# Allegro board wsm_p3_20170904.brd
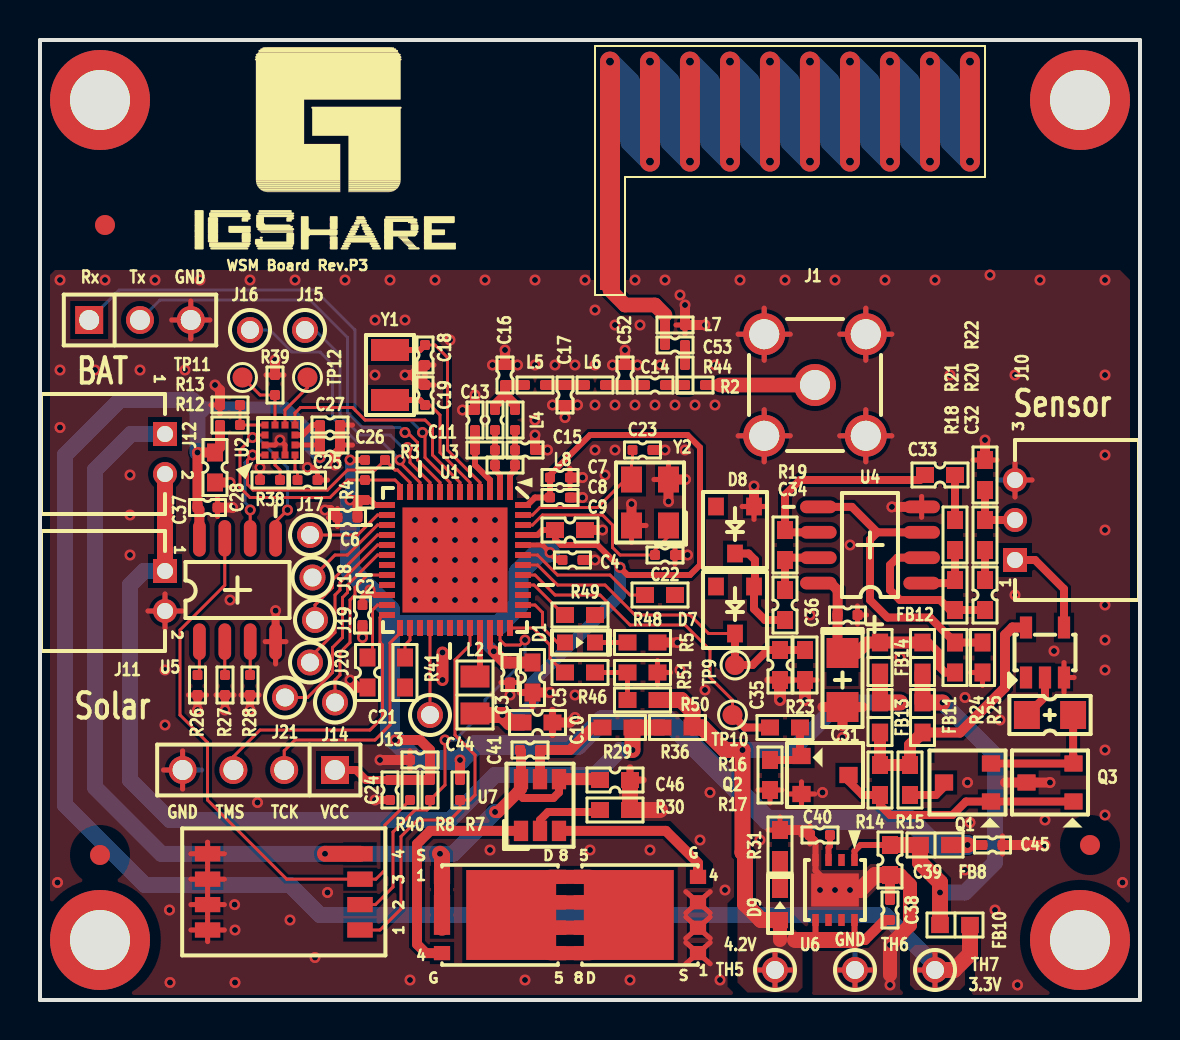
[diagram p0: board, top side]
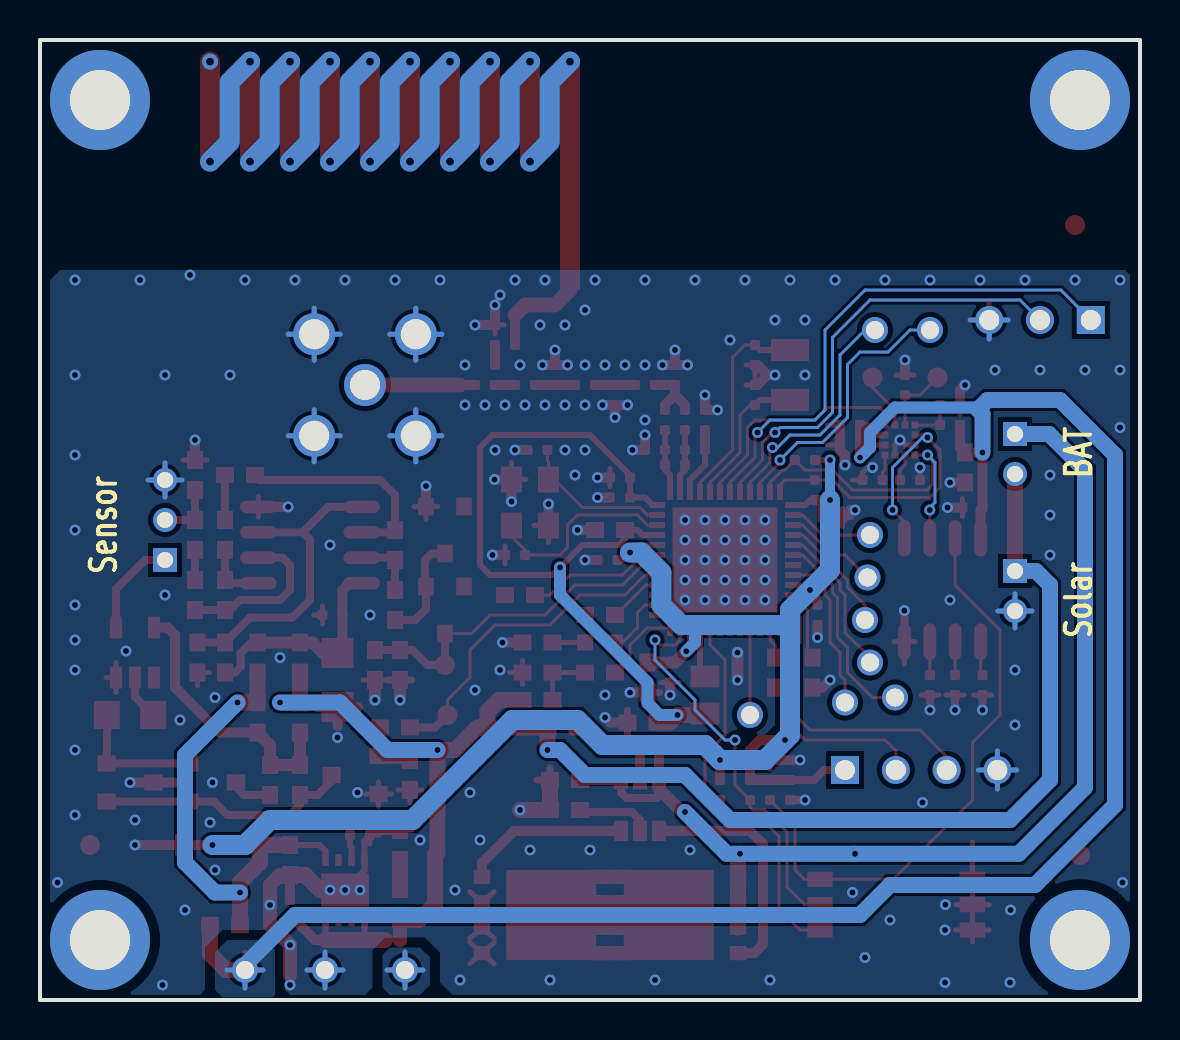
[diagram p1: board, bottom side, seen from below]

Outline 55 x 48 mm; copper layers: TOP, BOTTOM. Coordinates in mm from the lower left corner of the outline.
Outline path: 0,48 0,0 55,0 55,48 0,48

## Placement (name value [footprint] x y rotation side)
ANT1  ANTENNA  [ANTENNA868_915MHZ]  28.5 36 0 top
C2  100nF  [CC1005]  16.12 19.25 90 top
C3  100nF  [CC1005]  23.5 16.38 90 top
C4  100nF  [CC1005]  26.62 22 180 top
C5  22uF  [CC1608]  24.62 16.12 90 top
C6  100nF  [CC1005]  15.38 24.12 0 top
C7  100nF  [CC1005]  26 26.12 180 top
C8  100nF  [CC1005]  26 25.12 180 top
C9  22uF  [CC1608]  26.5 23.5 180 top
C10  DNI  [CC1608]  24.88 13.88 180 top
C11  100pF  [CC1005]  21.75 29 90 top
C13  3.6pF  [CC1005]  22.75 29 90 top
C14  100pF  [CC1005]  30.75 30.75 0 top
C15  3.6pF  [CC1005]  24.25 27.5 0 top
C16  2.7pF  [CC1005]  23.25 31.25 270 top
C17  6.2pF  [CC1005]  26.25 30.25 90 top
C18  12pF  [CC1005]  19.25 32.25 270 top
C19  12pF  [CC1005]  19.25 30.25 90 top
C21  1uF  [CC1608]  16.38 16.38 270 top
C22  DNI  [CC1005]  31.25 22.25 180 top
C23  DNI  [CC1005]  30.12 27.5 180 top
C24  100nF  [CC1005]  17.5 10.5 90 top
C25  100nF  [CC1005]  13.38 26 180 top
C26  100nF  [CC1005]  14.5 27.75 180 top
C27  100nF  [CC1005]  14.5 28.75 180 top
C28  10uF  [CC1608]  8.75 26.62 90 top
C29  47nF  [CC2012]  50.5 14.25 0 top
C31  6.8uF  [TC3216]  40.12 16 270 top
C32  200pF  [CC1608]  47.25 20.25 90 top
C33  680pF  [CC1608]  45 26.25 0 top
C34  1nF  [CC1608]  37.25 19.75 90 top
C35  560pF  [CC1608]  37 16.75 90 top
C36  100nF  [CC1005]  40.38 19.25 180 top
C37  100nF  [CC1005]  8.38 24.62 0 top
C38  100nF  [CC1005]  42.5 4.5 90 top
C39  2.2uF  [CC1608]  42.5 7 270 top
C40  100nF  [CC1005]  39 8.25 180 top
C41  100nF  [CC1005]  24.5 12.5 180 top
C44  100nF  [CC1005]  19 12 0 top
C45  100nF  [CC1005]  47.62 7.75 0 top
C46  1uF  [CC1608]  28.75 11 180 top
C52  3.3pF  [CC1005]  29.25 31.25 270 top
C53  1pF  [CC1005]  31.75 32.75 180 top
D1  BL-HG036A-AV-TRB  [BL-HG036A-AV]  27 17.88 0 top
D7  -  [BAT54]  34.75 19.5 180 top
D8  -  [BAT54]  34.75 23.5 180 top
D9  BL-HG036A-AV-TRB  [BL-HG036A-AV]  37 4.75 90 top
FB8  BLM18HE152SN1  [BEAD1608]  44.75 7.75 0 top
FB10  BLM18HE152SN1  [BEAD1608]  45.75 3.75 0 top
FB11  BLM18HE152SN1  [BEAD1608]  44.12 14.12 270 top
FB12  BLM18HE152SN1  [BEAD1608]  44.12 17.12 90 top
FB13  BLM18HE152SN1  [BEAD1608]  42 14.12 270 top
FB14  BLM18HE152SN1  [BEAD1608]  42 17.12 90 top
H1  PCB_HOLE  [PCB-HOLE]  3 45 0 top
H2  PCB_HOLE  [PCB-HOLE]  52 45 0 top
H3  PCB_HOLE  [PCB-HOLE]  3 3 0 top
H4  PCB_HOLE  [PCB-HOLE]  52 3 0 top
J1  RF__SMA-R-PC/DNI  [RF_SMA_R_PC]  38.75 30.75 0 top
J6  HEADER_2.54mm_3P  [HEADER3]  5 34 0 top
J7  HEADER_2.54mm_4P/DNI  [HEADER4]  14.75 11.5 180 top
J10  -  [A2001-WR03]  48.75 24 90 top
J11  -  [A2001-WR02]  6.25 20.45 270 top
J12  -  [A2001-WR02]  6.25 27.3 270 top
J13  1__PIN__HDR  [1PIN-HDR]  19.5 14.25 270 top
J14  1__PIN__HDR  [1PIN-HDR]  14.75 14.88 0 top
J15  1__PIN__HDR  [1PIN-HDR]  13.25 33.5 0 top
J16  1__PIN__HDR  [1PIN-HDR]  10.5 33.5 0 top
J17  1__PIN__HDR  [1PIN-HDR]  13.5 23.25 0 top
J18  1__PIN__HDR  [1PIN-HDR]  13.62 21.12 0 top
J19  1__PIN__HDR  [1PIN-HDR]  13.75 19 0 top
J20  1__PIN__HDR  [1PIN-HDR]  13.5 16.88 0 top
J21  1__PIN__HDR  [1PIN-HDR]  12.25 15.12 0 top
L2  6.8uH  [BEAD2012]  21.75 15.25 270 top
L3  7.5nH  [BEAD1005]  22.25 27.5 180 top
L4  7.5nH  [BEAD1005]  23.75 29 90 top
L5  6.8nH  [BEAD1005]  24.75 30.75 0 top
L6  6.8nH  [BEAD1005]  27.75 30.75 0 top
L7  12nH  [BEAD1005]  31.75 33.75 0 top
L8  18nH  [BEAD1005]  23.25 26.75 180 top
NOREF  -  [unnamed]  3.25 38.75 0 top
NOREF#2  -  [unnamed]  3 7.25 0 top
NOREF#3  -  [#2]  0 48 0 top
NOREF#4  -  [unnamed]  52.5 7.75 0 top
NOREF#5  -  [#2]  69.25 -8.62 0 top
NOREF#6  -  [#2]  0 0 90 top
NOREF#7  -  [#2]  13.38 43.88 0 top
NOREF#8  -  [#2]  68.25 11.12 0 top
Q1  MMBT3904  [SOT-23]  46.38 10.88 90 top
Q2  MMBT3904  [SOT-23]  39.25 11.25 270 top
Q3  MMBT3906  [SOT-23]  50.5 10.88 90 top
Q4  -  [CSD16413Q5A]  30 4.25 180 top
Q5  -  [CSD16413Q5A]  23 4.25 0 top
R2  0  [RC1005]  32.75 30.75 180 top
R3  4.7K  [RC1005]  16.75 27 180 top
R4  4.7K  [RC1005]  16.25 25.5 270 top
R5  330  [RC1608]  30.12 17.88 180 top
R7  4.7K  [RC1005]  21 10.5 90 top
R8  4.7K  [RC1005]  19.5 10.5 90 top
R12  1K  [RC1005]  9.5 28.75 180 top
R13  1K/DNI  [RC1005]  9.5 29.75 0 top
R14  47K  [RC1608]  42 11 90 top
R15  200  [RC1608]  43.5 11 90 top
R16  10K  [RC1608]  37.25 13.62 0 top
R17  10K  [RC1608]  36.5 11.25 90 top
R18  1M  [RC1608]  45.75 20.25 90 top
R19  1M  [RC1608]  37.25 22.75 270 top
R20  10K  [RC1608]  47.25 23.25 270 top
R21  10K  [RC1608]  45.75 23.25 90 top
R22  100K  [RC1608]  47.25 26.25 270 top
R23  510K  [RC1608]  38.25 16.75 90 top
R24  10K  [RC1608]  45.75 17.12 90 top
R25  10K  [RC1608]  47.12 17.12 90 top
R26  1K  [RC1005]  7.88 15.75 90 top
R27  1K  [RC1005]  9.25 15.75 90 top
R28  1K  [RC1005]  10.5 15.75 90 top
R29  330  [RC1608]  28.88 13.62 180 top
R30  1K  [RC1608]  28.75 9.5 0 top
R31  330  [RC1608]  37 7.75 270 top
R36  0  [RC1608]  31.88 13.62 180 top
R38  0  [RC1005]  11.5 26 180 top
R39  0  [RC1005]  11.75 30.75 270 top
R40  4.7K  [RC1005]  18.5 10.5 90 top
R41  0  [RC1608]  18.25 16.38 270 top
R44  0  [RC1005]  32.25 31.25 270 top
R46  200K  [RC1608]  27 16.38 180 top
R48  0  [RC1608]  31 20.25 0 top
R49  0  [RC1608]  27 19.25 0 top
R50  4.7K  [RC1608]  30.12 15 180 top
R51  4.7K  [RC1608]  30.12 16.38 0 top
S1  -  [KHS-42C]  16 3.5 90 top
TH5  D4V2P  [1PIN-HDR]  36.75 1.5 0 top
TH6  GND  [1PIN-HDR]  40.75 1.5 0 top
TH7  D3V3P  [1PIN-HDR]  44.75 1.5 0 top
TP9  T__POINT__S  [TP_SMD]  34.75 16.75 0 top
TP10  T__POINT__S  [TP_SMD]  34.62 14.25 0 top
TP11  T__POINT__S  [TP_SMD]  10.12 31.12 0 top
TP12  T__POINT__S  [TP_SMD]  13.38 31.12 270 top
U1  CC1310F128RGZT  [QFN48_7_0_5]  20.75 22 270 top
U2  LIS3MDL  [LGA-12]  12 28 90 top
U4  TLV342IDR  [SOP8_3_9_6_1_27]  41.5 22.75 90 top
U5  AT24HC02C-SSHM__  [SOP8_3_9_6_1_27]  9.88 20.5 0 top
U6  TPS73533QDRBRQ1  [QFN8_3_0_65]  39.75 5.5 180 top
U7  S-8200ABE-M6T1U  [SOT23-6P]  25 9.75 0 top
U8  SN74LVC1G04  [SOT23-5P_0_95P]  50.25 17.38 0 top
Y1  32.768KHz__XTAL/CM315D3279DZFT  [CM315]  17.5 31.25 90 top
Y2  24__MHz__Crystal/S3225A__Crystal  [S3225A]  30.5 24.88 90 top

## Library data of the parts
ANT1 = _ANTENNA868_915MHZ
C2-C4 C6-C8 C11 C13-C19 C22-C27 C36-C38 C40 C41 C44 C45 C52 C53 = _CC1005
C5 C9 C10 C21 C28 C32-C35 C39 C46 = _CC1608
C29 = _CC2012
C31 = _TC3216
D1 D9 = _BL-HG036A-AV
D7 D8 = _BAT54
FB8 FB10-FB14 = _BEAD1608
H1-H4 = _PCB-HOLE
J1 = _RF_SMA_R_PC
J6 = _HEADER3
J7 = _HEADER4
J10 = _A2001-WR03
J11 J12 = _A2001-WR02
J13-J21 TH5-TH7 = _1PIN-HDR
L2 = _BEAD2012
L3-L8 = _BEAD1005
Q1-Q3 = _SOT-23
Q4 Q5 = _CSD16413Q5A
R2-R4 R7 R8 R12 R13 R26-R28 R38-R40 R44 = _RC1005
R5 R14-R25 R29-R31 R36 R41 R46 R48-R51 = _RC1608
S1 = _KHS-42C
TP9-TP12 = _TP_SMD
U1 = _QFN48_7_0_5
U2 = _LGA-12
U4 U5 = _SOP8_3_9_6_1_27
U6 = _QFN8_3_0_65
U7 = _SOT23-6P
U8 = _SOT23-5P_0_95P
Y1 = _CM315
Y2 = _S3225A

## Footprints (pads in the part's own frame, mm; a bottom-side part is the same pattern mirrored in y, then rotated)
1PIN-HDR
  round 1.3 hole 0.9: 1(0,0)
A2001-WR02
  rect 1.2x1.2 hole 0.8: 1(-1,0)
  round 1.2 hole 0.8: 2(1,0)
A2001-WR03
  rect 1.2x1.2 hole 0.8: 1(-2,0)
  round 1.2 hole 0.8: 2(0,0) 3(2,0)
ANTENNA868_915MHZ
  rect 1x1 smd: 1(0,0)
BAT54
  rect 0.787x0.889 smd: 1(0,1.175) 2(-0.95,-1.175) 3(0.95,-1.175)
BEAD1005
  custom 0.5x0.5 smd: 1(-0.5,0) 2(0.5,0)
BEAD1608
  rect 0.889x0.813 smd: 1(-0.75,0) 2(0.75,0)
BEAD2012
  rect 1.1x1.45 smd: 1(-0.925,0) 2(0.925,0)
BL-HG036A-AV
  rect 0.8x0.8 smd: 1(-0.75,0) 2(0.75,0)
CC1005
  custom 0.5x0.5 smd: 1(-0.5,0) 2(0.5,0)
CC1608
  rect 0.9x0.8 smd: 1(-0.75,0) 2(0.75,0)
CC2012
  rect 1.295x1.397 smd: 1(-1.156,0) 2(1.156,0)
CM315
  rect 1.1x1.9 smd: 1(-1.25,0) 2(1.25,0)
CSD16413Q5A
  rect 0.813x0.711 smd: 1(-2.9,1.905) 2(-2.9,0.635) 3(-2.9,-0.635) 4(-2.9,-1.905) 5(2.9,-1.905) 6(2.9,-0.635) 7(2.9,0.635) 8(2.9,1.905)
  rect 4.496x4.496 smd: 9(0.559,0)
HEADER3
  rect 1.4x1.4 hole 1: 1(-2.54,0)
  round 1.4 hole 1: 2(0,0) 3(2.54,0)
HEADER4
  rect 1.4x1.4 hole 1: 1(0,0)
  round 1.4 hole 1: 2(2.54,0) 3(5.08,0) 4(7.62,0)
KHS-42C
  rect 0.762x1.27 smd: 1(0,0) 2(1.27,0) 3(2.54,0) 4(3.81,0) 5(3.81,7.62) 6(2.54,7.62) 7(1.27,7.62) 8(0,7.62)
LGA-12
  rect 0.35x0.35 smd: 1(-0.75,0.75) 2(-0.75,0.25) 3(-0.75,-0.25) 4(-0.75,-0.75) 5(-0.25,-0.75) 6(0.25,-0.75) 7(0.75,-0.75) 8(0.75,-0.25) 9(0.75,0.25) 10(0.75,0.75) 11(0.25,0.75) 12(-0.25,0.75)
PCB-HOLE
  round 5 hole 3: 1(0,0)
QFN8_3_0_65
  rect 0.325x0.6 smd: 1(-0.975,-1.5) 2(-0.325,-1.5) 3(0.325,-1.5) 4(0.975,-1.5) 5(0.975,1.5) 6(0.325,1.5) 7(-0.325,1.5) 8(-0.975,1.5)
  rect 2.388x1.651 smd: 9(0,0)
QFN48_7_0_5
  rect 0.8x0.3 smd: 1(-3.4,2.75) 2(-3.4,2.25) 3(-3.4,1.75) 4(-3.4,1.25) 5(-3.4,0.75) 6(-3.4,0.25) 7(-3.4,-0.25) 8(-3.4,-0.75) 9(-3.4,-1.25) 10(-3.4,-1.75) 11(-3.4,-2.25) 12(-3.4,-2.75) 25(3.4,-2.75) 26(3.4,-2.25) 27(3.4,-1.75) 28(3.4,-1.25) 29(3.4,-0.75) 30(3.4,-0.25) 31(3.4,0.25) 32(3.4,0.75) 33(3.4,1.25) 34(3.4,1.75) 35(3.4,2.25) 36(3.4,2.75)
  rect 0.3x0.8 smd: 13(-2.75,-3.4) 14(-2.25,-3.4) 15(-1.75,-3.4) 16(-1.25,-3.4) 17(-0.75,-3.4) 18(-0.25,-3.4) 19(0.25,-3.4) 20(0.75,-3.4) 21(1.25,-3.4) 22(1.75,-3.4) 23(2.25,-3.4) 24(2.75,-3.4) 37(2.75,3.4) 38(2.25,3.4) 39(1.75,3.4) 40(1.25,3.4) 41(0.75,3.4) 42(0.25,3.4) 43(-0.25,3.4) 44(-0.75,3.4) 45(-1.25,3.4) 46(-1.75,3.4) 47(-2.25,3.4) 48(-2.75,3.4)
  rect 5.25x5.25 smd: 49(0,0)
RC1005
  custom 0.5x0.5 smd: 1(-0.5,0) 2(0.5,0)
RC1608
  rect 0.9x0.8 smd: 1(-0.75,0) 2(0.75,0)
RF_SMA_R_PC
  round 2.1 hole 1.5: 1(0,0) 2(-2.54,2.54) 3(2.54,2.54) 4(2.54,-2.54) 5(-2.54,-2.54)
S3225A
  rect 1.3x1.05 smd: 1(-1.15,-0.925) 2(1.15,-0.925) 3(1.15,0.925) 4(-1.15,0.925)
SOP8_3_9_6_1_27
  oval 0.635x1.829 smd: 1(-1.905,-2.583) 2(-0.635,-2.583) 3(0.635,-2.583) 4(1.905,-2.583) 5(1.905,2.583) 6(0.635,2.583) 7(-0.635,2.583) 8(-1.905,2.583)
SOT23-5P_0_95P
  rect 0.61x1.092 smd: 1(-0.95,-1.25) 2(0,-1.25) 3(0.95,-1.25) 4(0.95,1.25) 5(-0.95,1.25)
SOT23-6P
  rect 0.711x1.016 smd: 1(-0.95,-1.295) 2(0,-1.295) 3(0.95,-1.295) 4(0.95,1.295) 5(0,1.295) 6(-0.95,1.295)
SOT-23
  rect 0.813x0.914 smd: 1(-0.95,-1.175) 2(0.95,-1.175) 3(0,1.175)
TC3216
  rect 1.499x1.6 smd: 1(-1.35,0) 2(1.35,0)
TP_SMD
  round 1 smd: 1(0,0)
unnamed
  round 1 smd: (0,0)

## Nets
D3V3P: C26.2 C27.2 C28.2 C37.1 FB10.2 R12.2 TH7.1 U2.5 U2.6 U5.8
D3V3P_MCU: C2.2 C3.2 C4.2 C5.2 C6.2 C24.2 C44.2 C45.1 FB8.2 J7.1 R3.2 R4.2 R7.2 R8.2 R40.2 U1.13 U1.22 U1.34 U1.44
D3V3P_RX: C31.1 C36.2 FB12.2 FB14.2 R24.1 U4.8
D3V3P_TX: FB11.2 FB13.2 R14.2 R15.2 U8.5
D3V3P_US: C39.1 FB8.1 FB10.1 FB11.1 FB12.1 U6.1
D4V2P: C38.1 D9.1 FB13.1 FB14.1 R36.1 R50.1 TH5.1 U6.5 U6.8
GND: C2.1 C3.1 C4.1 C5.1 C6.1 C7.1 C8.1 C9.1 C10.1 C11.2 C15.2 C16.1 C17.1 C18.2 C19.2 C21.2 C22.1 C23.1 C24.1 C25.1 C26.1 C27.1 C28.1 C31.2 C35.1 C36.1 C37.2 C38.2 C39.2 C40.2 C44.1 C45.2 C46.1 C52.1 D8.2 J1.2 J1.3 J1.4 J1.5 J6.3 J7.4 J10.3 J11.2 L7.2 Q2.2 Q3.3 Q4.1 Q4.2 Q4.3 R5.1 R13.1 R17.1 R22.1 R23.1 R25.1 R26.1 R27.1 R28.1 R30.2 R31.1 R38.2 R39.1 R51.2 S1.5 S1.6 S1.7 S1.8 TH6.1 U1.49 U2.3 U2.12 U4.4 U5.4 U6.4 U6.9 U8.3 Y2.2 Y2.4
GND-B: C41.2 C46.2 J12.1 Q5.1 Q5.2 Q5.3 S1.4 U7.4 U7.6
VDDR: C7.2 C8.2 C9.2 C10.2 L2.2 U1.45 U1.48
/RESET: R8.1 S1.2 U1.35
BTN_DOWN: J21.1 U1.18
BTN_RIGHT: J13.1 U1.28
BTN_SELECT: J20.1 U1.17
DCDC_SW: L2.1 U1.33
DRDY: TP12.1 U2.8
EEPROM_WP: R40.1 S1.3 U5.7
ENABLE: R12.1 R13.2 U2.10
I2C_SCL: R3.1 U1.11 U2.1 U5.6
I2C_SDA: R4.1 U1.12 U2.11 U5.5
INT: U1.6 U2.7
JTAG_TCK: J7.2 U1.25
JTAG_TMS: J7.3 U1.24
LCD_CS: J14.1 U1.20
LCD_MODE: J15.1 U1.9
LCD_RESET: J16.1 U1.10
PLS_OUT: J10.1 U8.4
ROM_EN: R7.1 S1.1 U1.32
RX_ADC: C35.2 D7.1 R23.2 TP9.1 U1.42
RX_IN: J10.2 R20.1 R22.2
RX_TX: C11.1 L3.2 U1.3
SA1: R39.2 TP11.1 U2.9
SPI_MISO: J17.1 U1.14
SPI_MOSI: J18.1 U1.15
SPI_SCK: J19.1 U1.16
STATUS_LED1: D1.1 U1.38
TX_TRIG: R16.1 TP10.1 U1.41
UART_RX: J6.1 U1.7
UART_TX: J6.2 U1.8
N16701813: C25.2 U2.4
N16705809: C32.2 R20.2
N16705820: C32.1 R18.1 U4.2
N16705966: R24.2 R25.2 U4.3 U4.5
N16706795: C33.1 R19.1 U4.6
N16707221: R18.2 R21.1 U4.1
N16707237: C33.2 R21.2
N16707258: C34.2 R19.2 U4.7
N16707911: C34.1 D7.2 D8.1
N16724996: Q2.1 R16.2 R17.2
N16725044: Q1.1 Q2.3 Q3.1 R14.1
N16725134: C29.2 Q1.2 Q3.2
N16725188: C29.1 U8.2
N16760492: R27.2 U5.2
N16760496: R28.2 U5.3
N16760500: R26.2 U5.1
N16783258: C40.1 U6.3
N16792762: D9.2 R31.2
N16804439: J11.1 J12.2 R29.1 R36.2
N16804638: C41.1 R29.2 U7.5
N16804661: Q5.4 U7.1
N16804663: Q4.4 U7.3
N16805702: R30.1 U7.2
N16807892: Q4.5 Q4.6 Q4.7 Q4.8 Q4.9 Q5.5 Q5.6 Q5.7 Q5.8 Q5.9
N16891758: J1.1 R2.1
N16891821: C14.2 R2.2 R44.2
N16891831: C13.2 C16.2 L4.2 L5.1
N16891837: C13.1 L3.1 L8.2 U1.2
N16891839: C23.2 U1.47 Y2.3
N16891854: C14.1 C52.2 L6.2
N16891876: C17.2 L5.2 L6.1
N16891929: C15.1 L4.1 L8.1 U1.1
N16891931: C22.2 U1.46 Y2.1
N16892413: D1.2 R5.2
N16892809: R41.1 U1.26
N16898279: C53.1 R44.1
N16899923: R46.2 U1.36
N16902060: R48.1 U1.43
N16908824: C18.1 U1.4 Y1.2
N16908828: C19.1 U1.5 Y1.1
N16908887: C21.1 U1.23
N16909290: ANT1.1 C53.2 L7.1
N16917845: R49.1 U1.40
N16921284: R46.1 R50.2 R51.1
N167017791: R38.1 U2.2
N167250560: Q1.3 R15.1

Pads without a net: D7 3; D8 3; H1 1; H2 1; H3 1; H4 1; R41 2; R48 2; R49 2; U1 19 21 27 29 30 31 37 39; U6 2 6 7; U8 1

## Via types
v1: diameter 0.55, hole 0.3, TOP to BOTTOM, 226 vias
v2: diameter 0.8, hole 0.4, TOP to BOTTOM, 19 vias

## Routing (per net, layer and track width the routed paths; a pad name or vN(x,y) marks a point on that pad's centre or on a via; arc(x,y) is an arc through that point)
D3V3P: length 102.4
  TOP w0.25: 13,28.25 U2.6 ; U2.5 C26.2
  TOP w0.254: 44.75,0.6 TH7.1 ; TH7.1 43.85,1.5 ; TH7.1 44.75,2.4
  TOP w0.3: 13,28.25 13.12,28.25 13.62,28.75 C27.2
  TOP w0.5: v1(14,27.12) C26.2 C27.2 ; U5.8 7.97,24.53 C37.1 v1(7.88,27.38) C28.2 9,27.62 R12.2
  TOP w0.8: TH7.1 45.7,1.5 46.5,2.3 FB10.2
  BOTTOM w0.254: 43.85,1.5 TH7.1 ; TH7.1 44.75,0.6 ; TH7.1 45.65,1.5
  BOTTOM w0.6: v1(14,27.12) 13.5,27.62 13.5,28.38 12.25,29.62 8.2,29.62 8.1,29.52
  BOTTOM w0.8: TH7.1 44.75,1.75 42.25,4.25 14,4.25 12.5,5.75 5.25,5.75 1.25,9.75 1.25,27.25 4,30 7.62,30 8.1,29.52 7.88,29.3 v1(7.88,27.38)
D3V3P_MCU: length 81.6
  TOP w0.25: v1(25.5,22.38) 25.12,22.75 U1.44
  TOP w0.3: R3.2 v1(15.5,27) ; C4.2 25.88,22 v1(25.5,22.38) ; U1.13 16.75,24.75 16.5,25 R4.2 ; U1.34 22.5,17.62 v1(22.69,17.44) ; U1.22 16.75,20.25 v1(16.5,20.5) 16.12,20.12 C2.2
  TOP w0.4: C24.2 16.3,11 15.8,11.5 J7.1
  TOP w0.5: R7.2 v1(21,12) ; 16,25 v1(15.5,25) ; 16,25 R4.2 ; 16,25 15.88,24.88 C6.2 ; C24.2 R40.2 R8.2 C44.2 19.5,12.5 19,13 v1(17.75,13) ; C45.1 v1(46.38,7.75)
  TOP w0.6: C5.2 C3.2 23.25,16.88 v1(22.69,17.44)
  TOP w0.8: v1(46.38,7.75) FB8.2
  BOTTOM w0.5: v1(15.5,27) v1(15.5,25)
  BOTTOM w0.6: v1(22.69,17.44) 22.25,17.88 22.25,18.75
  BOTTOM w1: 17.5,18.75 22.93,18.75 23.93,19.75 23.93,21.38 24.93,22.38 v1(25.5,22.38) ; 17.5,18.75 17.5,19.5 v1(16.5,20.5) 15.5,21.5 v1(15.5,25) ; 17.5,18.75 17.5,13.25 v1(17.75,13) 18.75,12 v1(21,12) 21.75,12.75 26.88,12.75 28.12,14 31.38,14 36.38,9 43.5,9 44.75,7.75 v1(46.38,7.75)
D3V3P_RX: length 11.2
  TOP w0.4: FB12.2 44.43,17.88 44.97,17.34 44.97,16.66 45.25,16.38 R24.1
  TOP w0.5: C31.1 39.88,17.6 C36.2 39.88,19.26 39.88,20.49 39.53,20.84 U4.8
  TOP w0.6: C31.1 40.85,17.35 41.38,17.88 FB14.2 FB12.2
D3V3P_TX: length 13.9
  TOP w0.5: FB11.2 46,13.38 48.25,15.62 48.25,18.25 48.62,18.62 U8.5
  TOP w0.6: FB13.2 R14.2 R15.2 43.5,12.75 FB11.2
D3V3P_US: length 23.2
  TOP w0.3: U6.1 40.73,7.45 41.02,7.75 C39.1
  TOP w0.8: FB10.1 v1(45,5.38) 45,5.87 44,6.87 FB8.1 C39.1 ; FB12.1 FB11.1 v1(45.12,14.88)
  BOTTOM w0.8: v1(45,5.38) 46.25,5.38 47.75,6.88 47.75,12.25 v1(45.12,14.88)
D4V2P: length 42.3
  TOP w0.254: 35.85,1.5 TH5.1 ; TH5.1 36.75,2.4 ; TH5.1 37.65,1.5 ; TH5.1 36.75,0.6
  TOP w0.3: 38.75,3 38.77,3.02 U6.5 ; U6.8 40.73,3.02 40.75,3
  TOP w0.5: 40.75,3 41.25,3 42.25,4 C38.1
  TOP w0.7: 37,3 37,3.75
  TOP w0.8: R50.1 32.06,15 32.62,14.43 R36.1 33.12,13.62 34.25,12.5 v1(35.12,12.5) 35.12,7.38 35.25,7.25 35.25,4.8 36.05,4 D9.1 37,3.75 ; v1(43,14.88) FB13.1 FB14.1 ; 37.75,3 40.75,3
  BOTTOM w0.254: TH5.1 36.75,2.4 ; TH5.1 36.75,0.6 ; TH5.1 37.65,1.5 ; TH5.1 35.85,1.5
  BOTTOM w0.8: v1(35.12,12.5) 37.62,12.5 40,14.88 v1(43,14.88)
GND: length 213.2
  TOP w0.25: C27.1 15.62,28.75 ; U2.12 11.75,27.75 v1(12,28) 12.25,27.75 U2.3 ; 14.38,26 C25.1 13.88,26.38 13.62,26.62 v1(13.38,26.62) ; R38.2 v1(11,26.62) ; C26.1 15.62,27.75
  TOP w0.254: J6.3 8.49,34 ; J6.3 7.54,33.05 ; J6.3 7.54,34.95 ; J6.3 6.59,34 ; 47.12,15.72 R25.1 46.52,16.38 ; Q4.3 33.51,4.35 ; Q4.3 32.29,5.42 ; Q4.3 32.29,4.35 ; Q4.3 33.51,5.42 ; 40.75,0.6 TH6.1 ; TH6.1 39.85,1.5 ; TH6.1 41.65,1.5 ; 30.88,15.77 R51.2 ; R51.2 30.88,16.98 ; R51.2 31.53,16.38 ; J7.4 7.13,12.45 ; J7.4 7.13,10.55 ; J7.4 6.18,11.5 ; 32.29,3.08 Q4.2 ; Q4.2 32.29,4.15 ; Q4.2 33.51,4.15 ; Q4.2 33.51,3.08 ; 23.05,15.88 C3.1 23.95,15.88 ; S1.6 8.38,6.62 ; S1.6 7.54,6.04 ; S1.6 9.22,6.04 ; S1.6 8.38,5.46 ; 9,29.3 R13.1 8.55,29.75 ; S1.7 9.22,4.77 ; S1.7 7.54,4.77 ; S1.7 8.38,4.19 ; S1.7 8.38,5.35 ; R17.1 37.1,10.5 ; R17.1 36.5,9.85 ; R17.1 35.9,10.5 ; 8.8,15.25 R27.1 9.7,15.25 ; C36.1 41.33,19.25 ; C36.1 40.88,18.8 ; C36.1 40.88,19.7 ; 48.75,25.15 J10.3 ; J10.3 48.75,26.85 ; J10.3 49.6,26 ; J1.5 36.21,29.51 ; J1.5 34.91,28.21 ; J1.5 36.21,26.91 ; J1.5 37.51,28.21 ; Q2.2 38.08,10.91 ; Q2.2 38.08,9.69 ; Q2.2 38.73,10.3 ; Q2.2 37.42,10.3 ; J1.3 42.59,33.29 ; J1.3 41.29,34.59 ; J1.3 39.99,33.29 ; J1.3 41.29,31.99 ; 19.25,31.3 C18.2 19.7,31.75 ; 38.85,16 R23.1 37.65,16 ; 38.05,8.25 C40.2 ; C40.2 38.5,8.7 ; C40.2 38.5,7.8 ; 11.3,31.25 R39.1 12.2,31.25 ; 8.33,15.25 R26.1 7.42,15.25 ; 31.43,26.88 Y2.2 30.7,26.02 ; S1.8 8.38,4.08 ; S1.8 8.38,2.92 ; S1.8 9.22,3.5 ; S1.8 7.54,3.5 ; 29.57,22.87 Y2.4 30.3,23.73 ; C6.1 14.88,24.58 ; C6.1 14.42,24.12 ; C6.1 14.88,23.67 ; 32.29,2.88 Q4.1 ; Q4.1 33.51,1.81 ; Q4.1 32.29,1.81 ; Q4.1 33.51,2.88 ; 11.78,16.8 U5.4 ; U5.4 12.3,17.92 ; U5.4 11.26,17.92 ; 35.11,24.68 D8.2 ; D8.2 35.7,24.03 ; D8.2 36.29,24.68 ; S1.5 8.38,7.89 ; S1.5 9.22,7.31 ; S1.5 8.38,6.73 ; S1.5 7.54,7.31 ; 41.29,26.91 J1.4 ; J1.4 42.59,28.21 ; J1.4 39.99,28.21 ; J1.4 41.29,29.51 ; J1.2 36.21,34.59 ; J1.2 37.51,33.29 ; J1.2 36.21,31.99 ; J1.2 34.91,33.29 ; 36.4,8.5 R31.1 37,9.15 ; 46.65,27 R22.1 47.85,27 ; 31.75,22.7 C22.1 31.75,21.8 ; 44.08,24.14 U4.4 44.08,25.17 ; 32.25,33.3 L7.2 31.8,33.75 ; 26.5,26.58 C7.1 26.5,25.67 ; 5.4,19.45 J11.2 ; J11.2 6.25,18.6 ; J11.2 6.25,20.3 ; J11.2 7.1,19.45 ; 18.5,11.55 C44.1 18.5,12.45 ; U8.3 51.2,16.87 ; U8.3 51.2,15.38 ; U8.3 51.71,16.12 ; 19.25,31.2 C19.2 19.7,30.75 ; 8.88,25.08 C37.2 8.88,24.17 ; 48.12,8.2 C45.2 48.12,7.3 ; 10.05,15.25 R28.1 10.95,15.25
  TOP w0.3: v1(39.75,5.5) 38.77,6.47 U6.4 38.77,7.97 C40.2
  TOP w0.356: 30.15,11 C46.1 29.5,11.6 ; 37.6,16 C35.1 36.4,16 ; C10.1 25.62,14.48 ; C10.1 25.88,13.88 ; C10.1 25.62,13.27 ; 24.62,14.72 C5.1 24.02,15.38
  TOP w0.4: R28.1 v1(10.5,14.5) ; R26.1 v1(7.88,14.5) ; R27.1 v1(9.25,14.5) ; U5.4 v1(11.78,19.47) ; C24.1 v1(16.75,10)
  TOP w0.5: v1(32.27,26.02) Y2.2 v1(31.43,24.93) ; C23.1 v1(31.25,27.5) ; C44.1 v1(17,12) ; C21.2 15.88,15.62 v1(15.5,16) ; Y2.4 v1(29.57,24.8) ; C2.1 v1(16.12,18.12) ; C52.1 v1(29.25,32.5) ; C52.1 v1(29.88,31.75) ; C52.1 v1(28.62,31.75) ; R22.1 v1(47.25,28) ; C37.2 v1(9.62,24.62) ; C45.2 v1(50.25,7.75) ; v1(21.75,30.25) C11.2 v1(21.12,29.5) ; 25.88,13.88 26.5,13.88 v1(26.75,14.12) ; 47.12,16.43 R25.1 ; C3.1 v1(23.5,15.25) ; 18.62,31.25 19.12,31.75 C18.2 ; 18.62,31.25 v1(18.25,31.25) ; 18.62,31.25 19.12,30.75 C19.2 ; v1(33.25,33.75) L7.2 v1(32.25,34.75) ; C38.2 C39.2 ; C4.1 v1(27.75,22) ; C40.2 38.25,8.5 R31.1 ; R39.1 v1(11.75,32) ; v1(14.25,24.5) 14.5,24.5 C6.1 ; C8.1 v1(27.12,25.12) ; C22.1 v1(32.38,22.25) ; v1(50.5,10.88) Q3.3 48.25,10.88 ; v1(14.75,26.75) 14.75,27.25 15,27.5 C26.1 C27.1 ; C17.1 v1(26.25,29.12) ; C17.1 v1(26.88,29.75) ; C17.1 v1(25.62,29.75) ; D8.2 v1(35.7,25.7) ; C28.1 v1(9.5,25.88) ; C16.1 v1(23.88,31.75) ; C16.1 v1(22.62,31.75) ; C16.1 v1(23.25,32.5) ; C9.1 v1(28.12,23.5) ; v1(24.75,28.25) C15.2 v1(25.38,27.5) ; U4.4 v1(42.59,24.66) ; C5.1 v1(25.5,15.38) ; C7.1 v1(27.12,26.12) ; R5.1 v1(31.88,17.88) ; R13.1 9,30.5 v1(8.75,30.75)
  TOP w0.508: 40.12,13.7 C31.2 ; C31.2 41.13,14.65 ; C31.2 39.12,14.65
  TOP w0.6: R23.1 v1(38.25,15) ; v1(20.12,17.38) v1(20.12,16) ; C35.1 v1(37,15) ; C31.2 40.12,14.85
  TOP w0.7: C39.2 43,6.25 43.5,5.75 v1(43.5,4.75) 43.5,3.75 v1(42.5,2.75) 42.5,1.25
  TOP w0.8: C46.1 R30.2 v1(31,9.5) ; C39.2 41.75,6.25 41,5.5 v1(40.5,5.5) v1(39.75,5.5)
  BOTTOM w0.254: 7.54,33.05 J6.3 ; J6.3 8.49,34 ; J6.3 6.59,34 ; TH6.1 40.75,2.4 ; TH6.1 39.85,1.5 ; TH6.1 40.75,0.6 ; TH6.1 41.65,1.5 ; 7.13,10.55 J7.4 ; J7.4 7.13,12.45 ; J7.4 8.08,11.5 ; J7.4 6.18,11.5 ; 36.21,31.99 J1.2 ; J1.2 34.91,33.29 ; J1.2 36.21,34.59 ; J1.2 37.51,33.29 ; 39.99,28.21 J1.4 ; J1.4 42.59,28.21 ; J1.4 41.29,29.51 ; J1.4 41.29,26.91 ; J1.5 37.51,28.21 ; J1.5 36.21,26.91 ; J1.5 36.21,29.51 ; J1.5 34.91,28.21 ; J10.3 49.6,26 ; J10.3 48.75,26.85 ; J10.3 48.75,25.15 ; J10.3 47.9,26 ; 6.25,18.6 J11.2 ; J11.2 7.1,19.45 ; J11.2 6.25,20.3 ; J11.2 5.4,19.45 ; J1.3 41.29,34.59 ; J1.3 41.29,31.99 ; J1.3 39.99,33.29 ; J1.3 42.59,33.29
  vias: v1(0.88,5.88) v1(1,36) v1(1,31.5) v1(1,28.62) v1(2.75,31.5) v1(3.25,36) v1(4.5,26.25) v1(4.5,24.25) v1(4.5,22.25) v1(5,31.5) v1(5.75,36) v1(6.25,16.5) v1(6.25,13.75) v1(6.47,4.5) v1(6.5,0.88) v1(7.25,31.5) v1(8,36) v1(9.5,20) v1(9.73,4.77) v1(9.75,3.5) v1(9.75,0.88) v1(10.5,36) v1(10.88,9.88) v1(12.5,4) v1(12.75,36) v1(13.75,2.12) v1(14.38,5.38) v1(15.25,36) v1(16.75,34) v1(16.75,31.25) v1(17.5,36) v1(18.25,34) v1(18.5,1) v1(18.75,24) v1(18.75,23) v1(18.75,22) v1(18.75,21) v1(18.75,20) v1(19.75,36) v1(19.75,24) v1(19.75,23) v1(19.75,22) v1(19.75,21) v1(19.75,20) v1(20.5,33) v1(20.75,24) v1(20.75,23) v1(20.75,22) v1(20.75,21) v1(20.75,20) v1(21.75,24) v1(21.75,23) v1(21.75,22) v1(21.75,21) v1(21.75,20) v1(22.25,36) v1(22.5,7.5) v1(22.75,24) v1(22.75,23) v1(22.75,22) v1(22.75,21) v1(22.75,20) v1(24.25,1) v1(24.75,36) v1(24.75,31.75) v1(24.75,29) v1(25.75,31.75) v1(26.75,31.75) v1(26.75,15.25) v1(27.25,36) v1(27.5,7.5) v1(27.75,34.5) v1(27.75,31.75) v1(27.75,29.75) v1(27.75,27.5) v1(28.25,26.25) v1(28.75,33.75) v1(28.75,29.75) v1(28.75,27.5) v1(29.5,1) v1(29.75,36) v1(29.75,29.75) v1(30,33.75) v1(30.5,7.5) v1(30.75,29.75) v1(31,31.75) v1(31.25,36) v1(31.75,29.75) v1(32,35.25) v1(32,16.5) v1(32.25,27.5) v1(32.75,29.75) v1(33,8) v1(33.25,15.5) v1(33.5,10.38) v1(33.75,31.75) v1(33.75,29.75) v1(34,1) v1(34.25,5.5) v1(35,36) v1(36,8) v1(37.25,36) v1(38.5,19.25) v1(39,5.5) v1(39.12,10.38) v1(39.75,36) v1(40.12,13.12) v1(40.5,22.75) v1(42.25,36) v1(42.5,0.75) v1(43,17.12) v1(44.75,36) v1(45.5,31.25) v1(46.25,15.12) v1(46.25,6.5) v1(46.38,10.88) v1(46.5,8.88) v1(47.5,36.25) v1(47.75,4.5) v1(48,14) v1(48.75,31.25) v1(48.75,20.25) v1(48.88,0.75) v1(50,36) v1(50.25,9) v1(50.7,17.45) v1(53.25,36) v1(53.25,31.25) v1(53.25,27.25) v1(53.25,23.5) v1(53.25,19.75) v1(53.25,18) v1(53.25,16.5) v1(53.25,12.5) v1(53.25,9.25) v1(54.12,5.88)
GND-B: length 56.6
  TOP w0.4: U7.4 25.95,10.38 25.67,10.1 24.15,10.1 23.88,10.38
  TOP w0.5: C41.2 24.05,12.45 U7.6
  TOP w0.6: U7.4 27.95,11.04 C46.2 ; v1(22.75,9.4) 22.9,9.4 24.05,10.55 U7.6
  TOP w0.8: v1(14.25,7.31) S1.4 ; Q5.3 Q5.2 Q5.1 20.1,7.21 v1(20,7.31)
  BOTTOM w0.8: J12.1 4.55,28.3 2.75,26.5 2.75,10.62 6.07,7.31 v1(14.25,7.31) v1(20,7.31) 20.66,7.31 v1(22.75,9.4)
VDDR: length 40.3
  TOP w0.3: U1.48 24.38,24.75 24.75,25.12 C8.2 C7.2 25.5,26.25 27.5,28.25 32.38,28.25 33,27.62 33,21.75 32.5,21.25 29.38,21.25 v1(29,21.62) 27.88,22.75 26.05,22.75 25.75,23.05 C9.2 25.12,23.5 24.88,23.25 U1.45
  TOP w0.8: C10.2 23.5,13.88 v1(23.12,14.25) 21.82,14.25 L2.2
  BOTTOM w0.6: v1(23.12,14.25) 24.02,14.25 24.62,14.85 24.62,15.88 29,20.25 v1(29,21.62)
/RESET: length 19.8
  TOP w0.15: U1.35 23,18 23.25,17.75 24,17.75 v1(24.25,18) ; v1(20.25,13) 20.25,10.75 R8.1 19.5,9.65 19.35,9.5 18.75,9.5 17.65,8.4 17.65,5.65 16.77,4.77 S1.2
  BOTTOM w0.15: v1(24.25,18) 24.25,17 22.25,15 22.25,14.5 20.75,13 v1(20.25,13)
BTN_DOWN: length 10.2
  TOP w0.15: J21.1 13.38,15.12 14.62,16.38 14.62,17.62 15.12,18.12 15.12,20.12 15.38,20.38 15.38,20.75 16.88,22.25 U1.18
BTN_RIGHT: length 4.4
  TOP w0.15: U1.28 J13.1
BTN_SELECT: length 7.7
  TOP w0.15: U1.17 16.88,22.75 15,20.88 15,20.5 14.75,20.25 14.75,18.38 13.5,17.12 J20.1
DCDC_SW: length 2.5
  TOP w0.3: L2.1 22,16.43 U1.33
DRDY: length 2.8
  TOP w0.15: TP12.1 13.38,30.62 12.25,29.5 U2.8
EEPROM_WP: length 29.3
  TOP w0.15: U5.7 9.24,20.74 7,18.5 7,14.25 8.38,12.88 8.38,10 12.34,6.04 S1.3 16.79,6.04 17.25,6.5 17.25,8.75 R40.1
ENABLE: length 2.2
  TOP w0.15: R13.2 R12.1 U2.10
I2C_SCL: length 16.4
  TOP w0.15: U5.6 v1(10.51,24.5) ; U1.11 18.5,25.88 17.88,26.5 17.75,26.5 R3.1 16.75,26.5 15.38,26.5 14.38,25.5 10.65,25.5 10.38,25.77 10.38,27 v1(10.62,27.25) U2.1
  BOTTOM w0.15: v1(10.51,24.5) 10.51,24.61 10.25,24.88 10.25,26.88 v1(10.62,27.25)
I2C_SDA: length 18.6
  TOP w0.15: U1.12 18,25.75 17.75,26 R4.1 15.38,26 14.5,25.12 10.5,25.12 10,25.62 10,27.5 v1(10.62,28.12) 10.75,28.25 U2.11 ; U5.5 11.78,23.91 v1(12.38,24.5)
  BOTTOM w0.15: v1(10.62,28.12) 10.88,28.12 12.38,26.62 v1(12.38,24.5)
INT: length 11.8
  TOP w0.15: U2.7 12.75,29.35 13.03,29.62 15.62,29.62 16.25,29 19.25,29 19.62,28.62 19.62,27.25 21,25.88 U1.6
JTAG_TCK: length 11.8
  TOP w0.15: J7.2 12.21,12.46 12.75,13 16.75,13 17.5,13.75 17.5,17.85 18,18.35 U1.25
JTAG_TMS: length 14.4
  TOP w0.15: U1.24 17.12,19.25 17,19.12 17,17.88 17.12,17.75 17.12,14.12 16.5,13.5 11,13.5 9.67,12.17 J7.3
LCD_CS: length 8
  TOP w0.15: J14.1 14.75,16 15,16.25 15,17.38 15.5,17.88 15.5,20 15.75,20.25 15.75,20.62 16.38,21.25 U1.20
LCD_MODE: length 12
  TOP w0.15: v1(18.38,27.62) 18.5,27.5 18.5,26.88 19.5,25.88 U1.9
  BOTTOM w0.15: v1(18.38,27.62) 18.12,27.62 17.5,28.25 16,28.25 15,29.25 15,32.25 13.75,33.5 J15.1
LCD_RESET: length 13.8
  TOP w0.15: U1.10 19,25.88 18,26.88 v1(18,27)
  BOTTOM w0.15: J16.1 11.5,33.5 12.6,32.4 14,32.4 14.62,31.77 14.62,29.12 15.88,27.88 17.12,27.88 v1(18,27)
Net_20:
  vias: v2(28.5,46.92) v2(30.5,46.92) v2(30.5,41.92)
Net_21:
  vias: v2(46.5,46.92) v2(46.5,41.92)
Net_22:
  vias: v2(44.5,46.92) v2(44.5,41.92)
Net_23:
  vias: v2(42.5,46.92) v2(42.5,41.92)
Net_24:
  vias: v2(40.5,46.92) v2(40.5,41.92)
Net_25:
  vias: v2(38.5,46.92) v2(38.5,41.92)
Net_26:
  vias: v2(36.5,46.92) v2(36.5,41.92)
Net_27:
  vias: v2(34.5,46.92) v2(34.5,41.92)
Net_28:
  vias: v2(32.5,46.92) v2(32.5,41.92)
PLS_OUT: length 5
  TOP w0.4: J10.1 49.75,22 51.2,20.55 U8.4
ROM_EN: length 20
  TOP w0.15: U1.32 21.5,17.75 20.75,17 20.75,13.25 21.75,12.25 21.75,10.25 21.5,10 R7.1 21,9.5 20.5,9 18.88,9 18.05,8.18 18.05,4.55 17,3.5 S1.1
RX_ADC: length 17.4
  TOP w0.15: D7.1 33.42,18.32 32.5,19.25 29.75,19.25 28.25,20.75 25.88,20.75 24.88,21.75 U1.42
  TOP w0.4: R23.2 C35.2 36.38,17.5 35.62,16.75 TP9.1 D7.1
RX_IN: length 3
  TOP w0.4: R22.2 R20.1 J10.2
RX_TX: length 3.4
  TOP w0.3: L3.2 21.75,26.75 22.5,26 U1.3
  TOP w0.5: L3.2 C11.1
SA1: length 3.5
  TOP w0.15: U2.9 R39.2 11,30.25 TP11.1
SPI_MISO: length 4.3
  TOP w0.15: U1.14 16.88,24.25 15.88,23.25 J17.1
SPI_MOSI: length 4.8
  TOP w0.15: U1.15 16.88,23.75 15.38,22.25 14.75,22.25 J18.1
SPI_SCK: length 6
  TOP w0.15: J19.1 13.75,19.75 14.62,20.62 14.62,21 16.88,23.25 U1.16
STATUS_LED1: length 3.3
  TOP w0.15: D1.1 25.88,17.88 25.12,18.62 25.12,19.38 24.75,19.75 U1.38
TX_TRIG: length 16.8
  TOP w0.15: TP10.1 34.62,15 33.5,16.12 33.5,17.5 32.25,18.75 29.5,18.75 28,20.25 25.75,20.25 24.75,21.25 U1.41
  TOP w0.4: R16.1 35.25,13.62 TP10.1
UART_RX: length 26.1
  TOP w0.15: U1.7 20.5,25.88 19.25,27.12 19.25,28.25 v1(19.12,28.38)
  BOTTOM w0.15: J6.1 3.96,35.5 13.75,35.5 15.75,33.5 15.75,29.5 16.25,29 18.5,29 v1(19.12,28.38)
UART_TX: length 22.4
  TOP w0.15: v1(18.25,28.38) 18.38,28.38 18.88,27.88 18.88,27 20,25.88 U1.8
  BOTTOM w0.15: v1(18.25,28.38) 18,28.62 16.12,28.62 15.38,29.38 15.38,33.12 13.5,35 6,35 J6.2
N16701813: length 1.3
  TOP w0.15: C25.2 12.88,26.38 12.75,26.5 U2.4
N16705809: length 1.5
  TOP w0.4: R20.2 C32.2
N16705820: length 8.1
  TOP w0.4: C32.1 R18.1 45.5,19.5 45,20 43,20 42.5,20.5 42.5,21.75 42.87,22.11 U4.2
N16705966: length 15.7
  TOP w0.4: 41.87,23.39 41.5,23.02 41.5,20 42.38,19.12 44.5,19.12 R24.2 R25.2 ; 41.87,23.39 40.59,24.66 U4.5 ; 41.87,23.39 U4.3
N16706795: length 10.9
  TOP w0.4: U4.6 37.37,23.39 R19.1 37.25,25.25 38,26 44,26 C33.1
N16707221: length 3.2
  TOP w0.4: R21.1 R18.2 45.59,20.84 U4.1
N16707237: length 2.2
  TOP w0.4: R21.2 C33.2
N16707258: length 3.2
  TOP w0.4: C34.2 R19.2 37.37,22.11 U4.7
N16707911: length 5.4
  TOP w0.4: D8.1 35.42,22.32 35.75,22 35.75,20.73 D7.2 35.7,19.55 36.25,19 C34.1
N16724996: length 3.1
  TOP w0.4: R17.2 37.88,12 Q2.1 38,12.28 R16.2
N16725044: length 12.8
  TOP w0.4: Q2.3 40.42,10.95 41.12,10.25 R14.1 42,9.76 42.51,9.25 45.62,9.25 46.3,9.93 Q1.1 Q3.1
N16725134: length 6.6
  TOP w0.4: C29.2 51.66,12.22 51.67,12.2 Q3.2 Q1.2
N16725188: length 2.3
  TOP w0.4: U8.2 50.25,15.16 C29.1
N16760492: length 1.7
  TOP w0.15: U5.2 9.24,16.26 R27.2
N16760496: length 1.7
  TOP w0.15: U5.3 10.51,16.26 R28.2
N16760500: length 1.7
  TOP w0.15: R26.2 7.97,16.34 U5.1
N16783258: length 1.3
  TOP w0.3: U6.3 39.42,7.62 39.5,7.7 C40.1
N16792762: length 1.5
  TOP w0.8: R31.2 D9.2
N16804439: length 46.7
  TOP w0.8: v1(29.62,12.5) R29.1 R36.2 ; J11.1 J12.2
  BOTTOM w0.8: J11.1 5.2,21.45 4.5,20.75 4.5,11 6.5,9 20.5,9 22.75,11.25 27.75,11.25 29,12.5 v1(29.62,12.5)
N16804638: length 5
  TOP w0.5: R29.2 27.62,13.62 26.5,12.5 C41.1 U7.5
N16804661: length 11.9
  TOP w0.5: Q5.4 19.29,2.35 18.85,2.79 18.85,7.8 19.5,8.46 U7.1
N16804663: length 8.3
  TOP w0.5: Q4.4 32.9,6.85 31.3,8.46 U7.3
N16805702: length 3.8
  TOP w0.4: R30.1 27.9,9.4 25.4,9.4 25,9 U7.2
N16807892: length 25.9
  TOP w0.7: Q4.9 27.54,6.16 Q4.5 Q5.8 25.46,6.16 24.19,4.88 ; Q4.9 28.81,3.62 ; Q4.9 29,4.25 28.36,4.88 Q4.6 Q5.7 24.19,4.88 ; 24.19,4.88 Q5.9 ; Q5.9 24,4.25 24.64,3.62 Q5.6 Q4.7 28.81,3.62 ; Q5.9 25.46,2.35 Q5.5 Q4.8 27.54,2.35 28.81,3.62
N16891758: length 5.5
  TOP w0.5: R2.1 34,30.75
  TOP w0.73: 34,30.75 J1.1
N16891821: length 1
  TOP w0.5: C14.2 R44.2
N16891831: length 3.4
  TOP w0.5: C13.2 22.75,29.75 23.25,30.25 ; 23.25,30.25 C16.2 L5.1 ; 23.25,30.25 23.75,29.75 L4.2
N16891837: length 3.2
  TOP w0.3: U1.2 23,26.25 22.75,26.5 L8.2 L3.1 C13.1
N16891839: length 7.7
  TOP w0.15: C23.2 29.62,26.95 29.57,26.9 Y2.3 29.27,26.02 27.88,24.62 25,24.62 24.62,24.25 U1.47
N16891854: length 2
  TOP w0.5: L6.2 C52.2 C14.1
N16891876: length 2
  TOP w0.5: L6.1 C17.2 L5.2
N16891929: length 3.2
  TOP w0.3: U1.1 23.5,26.25 23.75,26.5 L8.1 C15.1 L4.1
N16891931: length 10
  TOP w0.15: U1.46 24.62,23.75 25.12,24.25 28.12,24.25 28.62,23.75 28.62,22.62 29,22.25 C22.2 30.75,22.5 31.43,23.18 Y2.1
N16892413: length 1.6
  TOP w0.25: D1.2 R5.2
N16892809: length 1.6
  TOP w0.15: R41.1 18.25,17.75 18.5,18 U1.26
N16898279: length 1
  TOP w0.5: R44.1 C53.1
N16899923: length 4.1
  TOP w0.15: U1.36 24.65,18.6 25.5,17.75 25.5,17.08 26.2,16.38 R46.2
N16902060: length 6.9
  TOP w0.15: R48.1 29.5,20.25 28.5,21.25 25.88,21.25 24.88,22.25 U1.43
N16908824: length 10.6
  TOP w0.15: C18.1 19.75,32.75 20.38,32.12 20.38,27.5 22,25.88 U1.4
  TOP w0.3: Y1.2 19,32.5 C18.1
N16908828: length 7.3
  TOP w0.15: U1.5 21.5,25.88 20,27.38 20,29.25 19.5,29.75 C19.1
  TOP w0.3: C19.1 19,30 Y1.1
N16908887: length 3.3
  TOP w0.15: C21.1 16.62,17.38 16.62,19.5 16.88,19.75 U1.23
N16909290: length 5.3
  TOP w0.5: 31.25,34.25 L7.1 C53.2
  TOP w0.73: ANT1.1 28.5,35.5 29.25,34.75 30.75,34.75 31.25,34.25
N16917845: length 2.7
  TOP w0.15: U1.40 24.7,20.75 26.2,19.25 R49.1
N16921284: length 3
  TOP w0.25: R50.2 R51.1 R46.1
N167017791: length 1.4
  TOP w0.15: U2.2 11.75,26.75 12,26.5 R38.1
N167250560: length 2.1
  TOP w0.4: R15.1 44.8,10.25 45.2,10.65 Q1.3

## Copper pours and planes (outline as drawn; the poured copper is in the pictures)
D3V3P on TOP: 43.5,0.75 43.75,0.5 46,0.5 46.25,0.75 46.25,2.75 43.75,2.75 43.5,2.5
D3V3P on BOTTOM: 43.25,2.5 43.25,0.25 43.38,0.12 45.88,0.12 46.25,0.5 46.25,2.38 45.62,3 43.75,3
D4V2P on TOP: 34.88,4.62 34.88,0.88 35.38,0.38 37.88,0.38 38.12,0.62 38.12,3.12 37.38,3.88 36.12,3.88 35.12,4.88
D4V2P on BOTTOM: 35.5,2.12 35.5,0.75 36,0.25 37.5,0.25 37.88,0.62 37.88,2.25 37.5,2.62 36,2.62
GND on TOP: 1.25,0.25 0.5,1 0.5,36.25 0.75,36.5 54,36.5 54.5,36 54.5,1 53.75,0.25 ; 25 cut-outs
GND on BOTTOM: 1.25,0.25 0.5,1 0.5,36.25 0.75,36.5 54,36.5 54.5,36 54.5,1 53.75,0.25 47,0.25 46.75,0.5 46.75,2.62 45.88,3.5 43.5,3.5 42.75,2.75 42.75,0.5 42.5,0.25 38.75,0.25 38.38,0.62 38.38,2.5 37.75,3.12 35.75,3.12 35,2.38 35,0.88 34.38,0.25 ; 3 cut-outs
Net_20 on BOTTOM (solid shape): 28.15,46.57 28.15,47.27 28.85,47.27 29.87,46.26 29.98,46.1 30.01,45.91 30.01,43.11 30.85,42.27 30.85,41.57 30.14,41.57 29.16,42.55 29.05,42.71 29.01,42.91 29.01,45.7
Net_22 on BOTTOM (solid shape): 42.14,46.57 42.14,47.27 42.85,47.27 43.87,46.26 43.97,46.1 44.01,45.91 44.01,43.11 44.85,42.27 44.85,41.57 44.14,41.57 43.16,42.55 43.05,42.71 43.01,42.91 43.01,45.7
Net_22 on BOTTOM (solid shape): 44.15,46.57 44.15,47.27 44.85,47.27 45.87,46.26 45.97,46.1 46.01,45.91 46.01,43.11 46.85,42.27 46.85,41.57 46.15,41.57 45.16,42.55 45.05,42.72 45.01,42.91 45.01,45.7
Net_23 on BOTTOM (solid shape): 40.15,46.57 40.15,47.27 40.85,47.27 41.87,46.26 41.97,46.1 42.01,45.91 42.01,43.11 42.85,42.27 42.85,41.57 42.14,41.57 41.16,42.55 41.05,42.71 41.01,42.91 41.01,45.7
Net_25 on BOTTOM (solid shape): 36.15,46.57 36.15,47.27 36.85,47.27 37.87,46.26 37.97,46.1 38.01,45.91 38.01,43.11 38.85,42.27 38.85,41.57 38.14,41.57 37.16,42.55 37.05,42.72 37.01,42.91 37.01,45.7
Net_25 on BOTTOM (solid shape): 38.14,46.57 38.14,47.27 38.85,47.27 39.86,46.26 39.97,46.1 40.01,45.91 40.01,43.11 40.85,42.27 40.85,41.57 40.14,41.57 39.16,42.55 39.05,42.72 39.01,42.91 39.01,45.7
Net_26 on BOTTOM (solid shape): 34.15,46.57 34.15,47.27 34.85,47.27 35.87,46.26 35.97,46.1 36.01,45.91 36.01,43.11 36.85,42.27 36.85,41.57 36.15,41.57 35.16,42.55 35.05,42.72 35.01,42.91 35.01,45.7
Net_28 on BOTTOM (solid shape): 30.14,46.57 30.15,47.27 30.85,47.27 31.87,46.26 31.97,46.1 32.01,45.91 32.01,43.11 32.85,42.27 32.85,41.57 32.14,41.57 31.16,42.55 31.05,42.71 31.01,42.91 31.01,45.7
Net_28 on BOTTOM (solid shape): 32.14,46.57 32.14,47.27 32.85,47.27 33.87,46.26 33.97,46.1 34.01,45.91 34.01,43.11 34.85,42.27 34.85,41.57 34.14,41.57 33.16,42.55 33.05,42.71 33.01,42.91 33.01,45.7
Net_20 on TOP (solid shape): 28,46.92 28.5,47.42 29,46.92 29,36.5 28,36.5
Net_20 on TOP (solid shape): 30,46.92 30.5,47.42 31,46.92 31,41.92 30.5,41.42 30,41.92
Net_21 on TOP (solid shape): 46,46.92 46.5,47.42 47,46.92 47,41.92 46.5,41.42 46,41.92
Net_22 on TOP (solid shape): 44,46.92 44.5,47.42 45,46.92 45,41.92 44.5,41.42 44,41.92
Net_23 on TOP (solid shape): 42,46.92 42.5,47.42 43,46.92 43,41.92 42.5,41.42 42,41.92
Net_24 on TOP (solid shape): 40,46.92 40.5,47.42 41,46.92 41,41.92 40.5,41.42 40,41.92
Net_25 on TOP (solid shape): 38,46.92 38.5,47.42 39,46.92 39,41.92 38.5,41.42 38,41.92
Net_26 on TOP (solid shape): 36,46.92 36.5,47.42 37,46.92 37,41.92 36.5,41.42 36,41.92
Net_27 on TOP (solid shape): 34,46.92 34.5,47.42 35,46.92 35,41.92 34.5,41.42 34,41.92
Net_28 on TOP (solid shape): 32,46.92 32.5,47.42 33,46.92 33,41.92 32.5,41.42 32,41.92

## Text on the board
Ref Des/Silkscreen Bottom: BAT | Solar | Sensor
Ref Des/Silkscreen Top: WSM Board Rev.P3 | Rx | Tx | GND | TMS | TCK | VCC | 4.2V | 3.3V | BAT | Solar | Sensor
User.19: L1:TOP conductor-copper 0.035mm | L2:TOP conductor-copper 0.035mm | * dielectric - FR4 0.73mm
User.21: FIGURE | SIZE | 0.30 | 0.40 | 0.80 | 0.90 | 1.00 | 1.50 | 3.00 | DRILL CHART: TOP to BOTTOM | ALL UNITS ARE IN MILLIMETERS | PLATED | QTY | 226 | 19 | 7 | 12 | 5 | 4
